# EAGLE board upconvertersch (EAGLE 9.6.2)
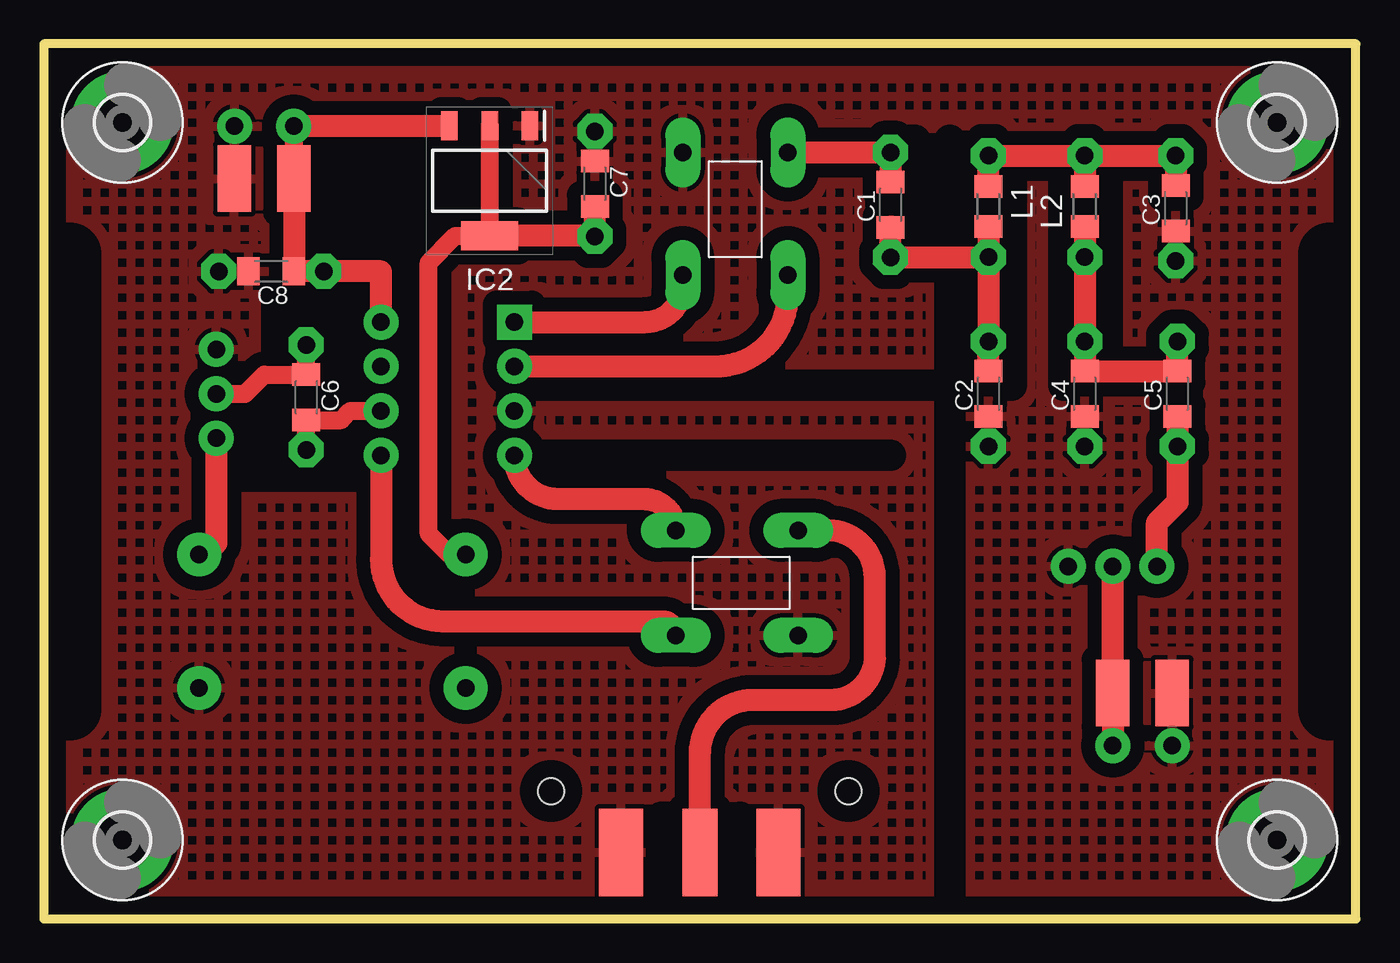
[diagram p0: board, top side]
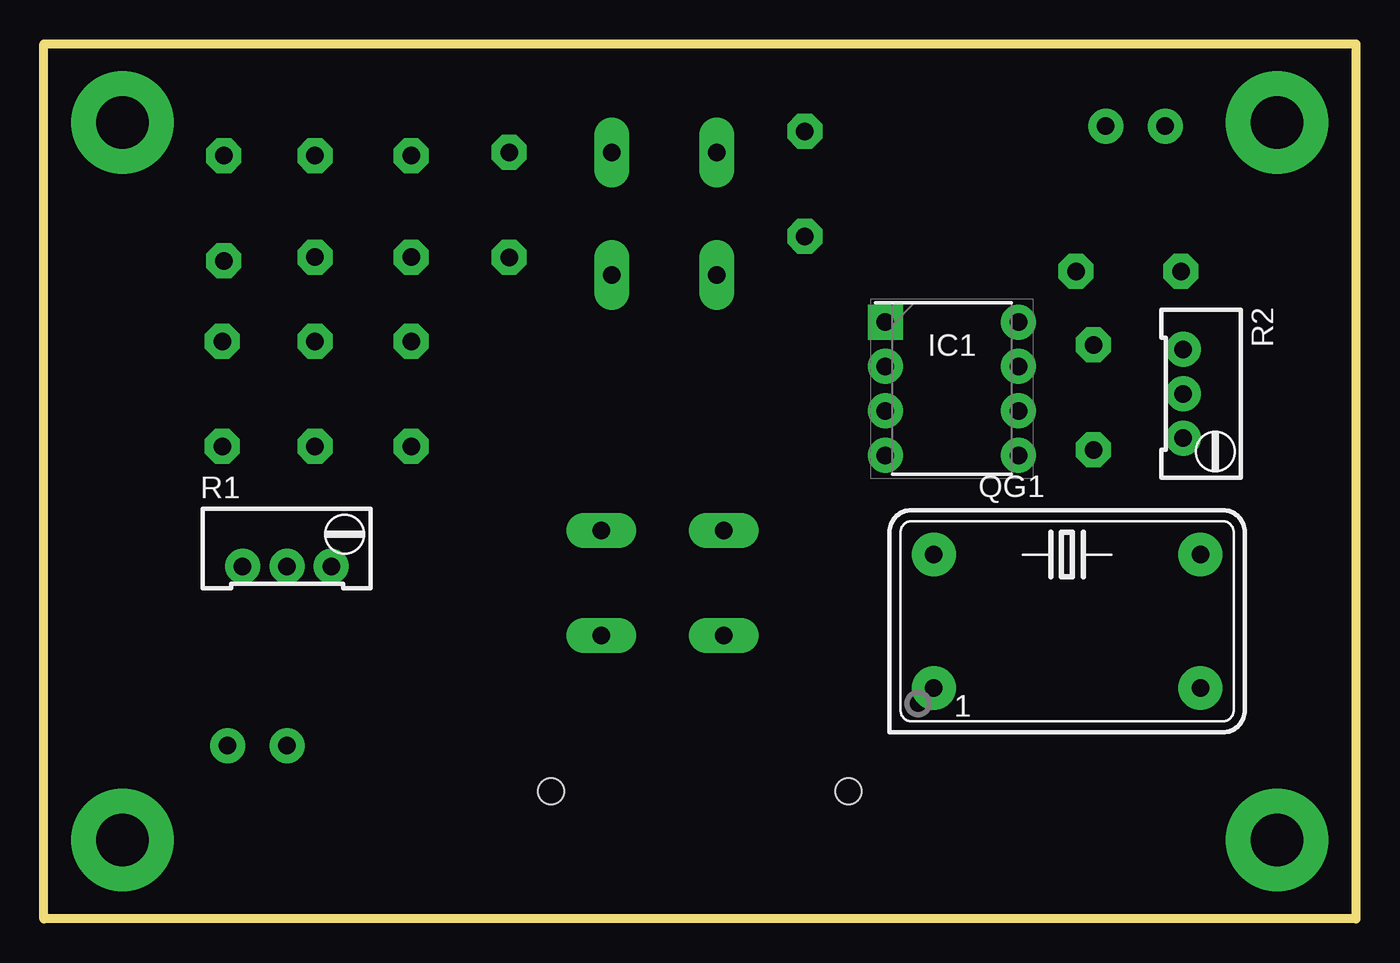
[diagram p1: board, bottom side, seen from below]

Size 75 x 50 mm. Coordinates in mm from the lower left corner, seen from the top.
Outline: 0,0 75,0 75,50 0,50 0,0
Copper layers (1*16): Top 0.035mm / dielectric 1.5mm / Bottom 0.035mm
Design rules "default": minimum track width 6mil, minimum drill 0.35mm, track to track 6mil, track to pad 6mil, pad to pad 6mil, via to via 6mil, smd to smd 6mil, copper to edge 40mil, drill to drill 6mil, minimum pad ring 10mil, minimum via ring 8mil, stop-mask expansion 4mil, vias tented up to drill 0mil, thermal gap 10mil
tRestrict: 14 lines

## Footprints (pad centres in the part's own frame; a part is rotated, then mirrored left to right if it is on the bottom)
2X_SMD_PTH = smd 3.81 x 1.93: P$1 0,1.7; P$2 0,-1.7 | drill 1 pad 2: T$1 3,1.7; T$2 3,-1.7
C0805K = smd 1.3 x 1.6: 1 -1.3,0; 2 1.3,0 | drill 1 pad 2 octagon: P$1 -3,0; P$2 3,0
3,0-PAD = drill 3 pad 5.842: B3,0 0,0
DIP762W53P254L950H420Q8N = drill 1 pad 2 square: 1 -3.81,3.81 | drill 1 pad 2: 2 -3.81,1.27; 3 -3.81,-1.27; 4 -3.81,-3.81; 5 3.81,-3.81; 6 3.81,-1.27; 7 3.81,1.27; 8 3.81,3.81
SOT230P700X180-4N = smd 1.65 x 0.95: 1 -3.15,2.3; 2 -3.15,0; 3 -3.15,-2.3 | smd 1.65 x 3.25: 4 3.15,0
M0805 = smd 1.3 x 1.6: 1 -1.15,0; 2 1.15,0 | drill 1 pad 2 octagon: P$1 -2.9,0; P$2 2.9,0
DIL14S = drill 1 pad 2.5: 1 -7.62,-3.81; 7 7.62,-3.81; 8 7.62,3.81; 14 -7.62,3.81
RTRIM64W = drill 1 pad 2: 1 1.27,-2.54; 2 1.27,0; 3 1.27,2.54
TRANSFORMER = drill 1 pad 2 long: P$1 -3,3; P$2 -3,-3; P$3 4,3; P$4 4,-3
RTL_SDR_OUT = smd 2 x 5: P$1 0,-3.5 | smd 2.5 x 5: P$2 -4.5,-3.5; P$3 4.5,-3.5 | hole 1.5: -8.5,0; 8.5,0

## Placement (x,y rotation side)
5V  2X_SMD_PTH_PIN  [2X_SMD_PTH]  12.6,42.3 90 top
C1  100nF  [C0805K]  48.4,40.8 90 top
C2  100pF  [C0805K]  54,30 90 top
C3  200pF  [C0805K]  64.7,40.6 90 top
C4  100pF  [C0805K]  59.5,30 90 top
C5  100nF  [C0805K]  64.8,30 90 top
C6  100nF  [C0805K]  15,29.8 270 top
C7  100nF  [C0805K]  31.5,42 270 top
C8  100nF  [C0805K]  13,37 180 top
H1  MOUNT-PAD-ROUND3.0  [3,0-PAD]  4.5,4.5 0 top
H2  MOUNT-PAD-ROUND3.0  [3,0-PAD]  70.5,4.5 0 top
H3  MOUNT-PAD-ROUND3.0  [3,0-PAD]  4.5,45.5 0 top
H4  MOUNT-PAD-ROUND3.0  [3,0-PAD]  70.5,45.5 0 top
IC1  SA612AN_01,112  [DIP762W53P254L950H420Q8N]  23.09,30.29 0 bottom
IC2  LD1117STR  [SOT230P700X180-4N]  25.49,42.17 270 top
L1  [M0805]  54,40.7 270 top
L2  [M0805]  59.5,40.7 90 top
QG1  [DIL14S]  16.5,17 0 bottom
R1  [RTRIM64W]  61.1,21.4 270 bottom
R2  [RTRIM64W]  8.6,30 180 bottom
RF_IN  2X_SMD_PTH_PIN  [2X_SMD_PTH]  62.8,12.9 270 top
T1  TRANSFORMER  [TRANSFORMER]  39.54,40.8 270 top
T2  TRANSFORMER  [TRANSFORMER]  40.12,19.19 180 top
U$1  RTL_SDR_CONN  [RTL_SDR_OUT]  37.5,7.3 0 top

## Library data of the parts
5V C1-C8 L1 L2 RF_IN T1 T2 U$1 = mylib
H1-H4 = holes
IC1 = SA612AN_01_112; DESCRIPTION: NXP SA612AN, Mixer Circuit Gain=17 dB 4.5 8 V 8-Pin PDIP; HEIGHT: 4.2mm; MANUFACTURER_NAME: Nexperia; MANUFACTURER_PART_NUMBER: SA612AN/01,112; MOUSER_PART_NUMBER: 771-SA612AN/01; MOUSER_PRICE-STOCK: https://www.mouser.com/Search/Refine.aspx?Keyword=771-SA612AN%2F01
IC2 = LD1117STR; ARROW_PART_NUMBER: LD1117STR; ARROW_PRICE-STOCK: https://www.arrow.com/en/products/ld1117str/stmicroelectronics?region=nac; DESCRIPTION: LD1117STR, Low Dropout Voltage Regulator, Adjustable 1.3A, 1.25 15 V +/-1%, 4-Pin SOT-223; HEIGHT: 1.8mm; MANUFACTURER_NAME: STMicroelectronics; MANUFACTURER_PART_NUMBER: LD1117STR; MOUSER_PART_NUMBER: 511-LD1117S; MOUSER_PRICE-STOCK: https://www.mouser.co.uk/ProductDetail/STMicroelectronics/LD1117STR?qs=tZUCD5p2VWoh5188srwsAQ%3D%3D
QG1 = crystal; OC_FARNELL: unknown; OC_NEWARK: unknown
R1 R2 = rcl; SPICEMODEL: X; SPICEPREFIXL: POT

## Nets
3.3V: C7.2 C7.P$2 IC2.2 IC2.4 QG1.14
GND: 5V.P$1 5V.T$1 C2.1 C2.P$1 C3.1 C3.P$1 C4.1 C4.P$1 C7.1 C7.P$1 C8.2 C8.P$2 H1.B3,0 H2.B3,0 H3.B3,0 H4.B3,0 IC1.3 IC2.1 QG1.7 R1.3 R2.1 RF_IN.P$1 RF_IN.T$1 T1.P$2 T2.P$1 U$1.P$2 U$1.P$3
N$1: IC1.1 T1.P$4
N$2: IC1.2 T1.P$3
N$3: IC1.4 T2.P$4
N$4: IC1.5 T2.P$3
N$5: C1.2 C1.P$2 T1.P$1
N$6: C1.1 C1.P$1 C2.2 C2.P$2 L1.2 L1.P$2
N$7: C3.2 C3.P$2 L1.1 L1.P$1 L2.2 L2.P$2
N$8: C4.2 C4.P$2 C5.2 C5.P$2 L2.1 L2.P$1
N$9: C5.1 C5.P$1 R1.1
N$10: R1.2 RF_IN.P$2 RF_IN.T$2
N$11: QG1.8 R2.3
N$12: T2.P$2 U$1.P$1
N$13: C6.1 C6.P$1 R2.2
N$14: C6.2 C6.P$2 IC1.6
VCC: 5V.P$2 5V.T$2 C8.1 C8.P$1 IC1.8 IC2.3

## Tracks (layer width: path | path; a pad name or v marks a point on that pad's centre or on a via)
3.3V
  Top 1.016: IC2.2 25.49,42.5 IC2.4 23.52,39.02 22,37.5 22,22 23.19,20.81 QG1.14
  Top 1.27: IC2.4 31.48,39.02 C7.P$2 C7.2
GND
  pour Top (isolate 0.8, hatched): -1.5,52 -1.5,-2 77,-2 77,52
N$1
  Top 1.27: IC1.1 34.4,34.1 arc90 36.54,36.24 T1.P$4
N$2
  Top 1.27: IC1.2 38.4,31.56 arc90 42.54,35.7 T1.P$3
N$3
  Top 1.27: T2.P$4 arc90 34.33,23.98 29.4,23.98 arc-90 IC1.4
N$4
  Top 1.27: IC1.5 19.28,20.54 arc90 22.82,17 35.31,17 arc-90 T2.P$3
N$5
  Top 1.27: T1.P$1 C1.P$2 C1.2
N$6
  Top 1.016: L1.2 53.95,39.5
  Top 1.27: 48.45,39.55 C1.1 C1.P$1 L1.P$2 | L1.2 L1.P$2 | L1.P$2 C2.P$2 C2.2
N$7
  Top 1.27: L1.1 L1.P$1 L2.P$2 | L2.P$2 L2.2 | L2.P$2 C3.P$2 C3.2
N$8
  Top 1.27: L2.1 L2.P$1 C4.P$2 C4.2 C5.2 C5.P$2
N$9
  Top 1.27: C5.1 C5.P$1 64.8,23.79 63.64,22.63 R1.1
N$10
  Top 1.27: R1.2 61.1,14.63 RF_IN.P$2 RF_IN.T$2
N$11
  Top 1.27: R2.3 9.87,21.46 9.22,20.81 QG1.8
N$12
  Top 1.27: T2.P$2 44.86,22.19 arc-90 47.5,19.55 47.5,15 arc-90 45,12.5 43.5,12.5 40.54,12.5 arc90 37.5,9.46 U$1.P$1
N$13
  Top 1.016: R2.2 11.5,30 12.6,31.1 C6.1 C6.P$1
N$14
  Top 1.016: C6.P$2 C6.2 | C6.2 15.02,28.52 | C6.2 17,28.5 17.52,29.02 IC1.6
VCC
  Top 0.61: IC2.3 22.6,45.32 22.6,45.3
  Top 1.016: 5V.P$2 5V.T$2
  Top 1.27: IC1.8 19.28,37 C8.P$1 C8.1 5V.P$2 | 22.6,45.3 5V.T$2